# EAGLE board max6675-breakout (EAGLE 6.3)
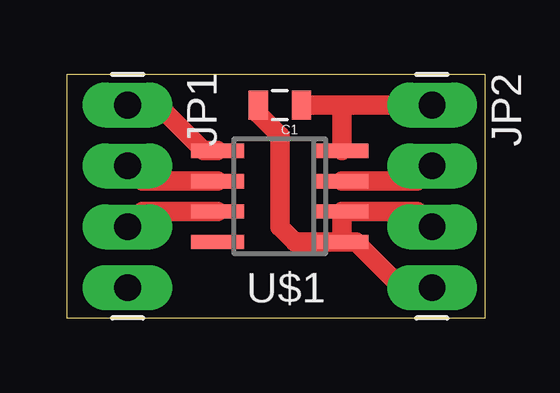
[diagram p0: board, top side]

Size 17.45 x 10.15 mm. Coordinates in mm from the lower left corner, seen from the top.
Outline: 0,0 17.45,0 17.45,10.15 0,10.15 0,0
Copper layers (1*16): Top 0.035mm / dielectric 1.5mm / Bottom 0.035mm
Design rules "default": minimum track width 10mil, minimum drill 24mil, track to track 8mil, track to pad 8mil, pad to pad 8mil, via to via 8mil, smd to smd 8mil, copper to edge 40mil, drill to drill 8mil, minimum pad ring 10mil, minimum via ring 8mil, stop-mask expansion 4mil, vias tented up to drill 0mil, thermal gap 10mil

## Footprints (pad centres in the part's own frame; a part is rotated, then mirrored left to right if it is on the bottom)
0805 = smd 0.8 x 1.2: 1 -0.9,0; 2 0.9,0
1X04_LONGPADS = drill 1.118 pad 1.88 long: 1 0,0; 2 2.54,0; 3 5.08,0; 4 7.62,0
SO08-MAX6675 = smd 0.6 x 2.2: 1 -1.905,-2.6; 2 -0.635,-2.6; 3 0.635,-2.6; 4 1.905,-2.6; 5 1.905,2.6; 6 0.635,2.6; 7 -0.635,2.6; 8 -1.905,2.6

## Placement (x,y rotation side)
C1  [0805]  8.89,8.89 180 top
JP1  [1X04_LONGPADS]  2.54,8.89 270 top
JP2  [1X04_LONGPADS]  15.24,8.89 270 top
U$1  MAX6675  [SO08-MAX6675]  8.89,5.08 90 top

## Library data of the parts
C1 = SparkFun-Passives
JP1 JP2 = SparkFun-Connectors
U$1 = SparkFun-AnalogIC

## Nets
+5V: C1.1 JP2.1 U$1.4
GND: C1.2 JP2.3 JP2.4 U$1.1 U$1.2
N$1: JP1.1 U$1.5
N$2: JP1.3 U$1.7
N$3: JP1.2 U$1.6
N$4: JP2.2 U$1.3

## Tracks (layer width: path | path; a pad name or v marks a point on that pad's centre or on a via)
+5V
  Top 0.813: C1.1 11.43,8.89 | 11.43,8.89 JP2.1 | U$1.4 11.49,8.83 11.43,8.89
GND
  Top 0.813: U$1.1 12.06,3.17 13.97,1.27 JP2.4 | C1.2 7.99,8.52 8.89,7.62 8.89,3.81 9.53,3.17 U$1.1 | JP2.3 14.61,4.45 U$1.2 U$1.1
N$1
  Top 0.813: U$1.5 5.71,6.99 3.81,8.89 JP1.1
N$2
  Top 0.813: U$1.7 3.17,4.45 JP1.3
N$3
  Top 0.813: U$1.6 3.17,5.71 JP1.2
N$4
  Top 0.813: U$1.3 14.61,5.71 JP2.2